# Altium PCB pid lab layout.PcbDoc
Units mil, origin at the board's own origin, x right, y up, seen from the top; angles counter-clockwise.
Board outline 6000 x 4000 mil, 2 copper layers (Top Layer, Bottom Layer); 26 components, 27 nets, 75 pads, 0 vias.
Unrouted connection lines stored in the file: 20.
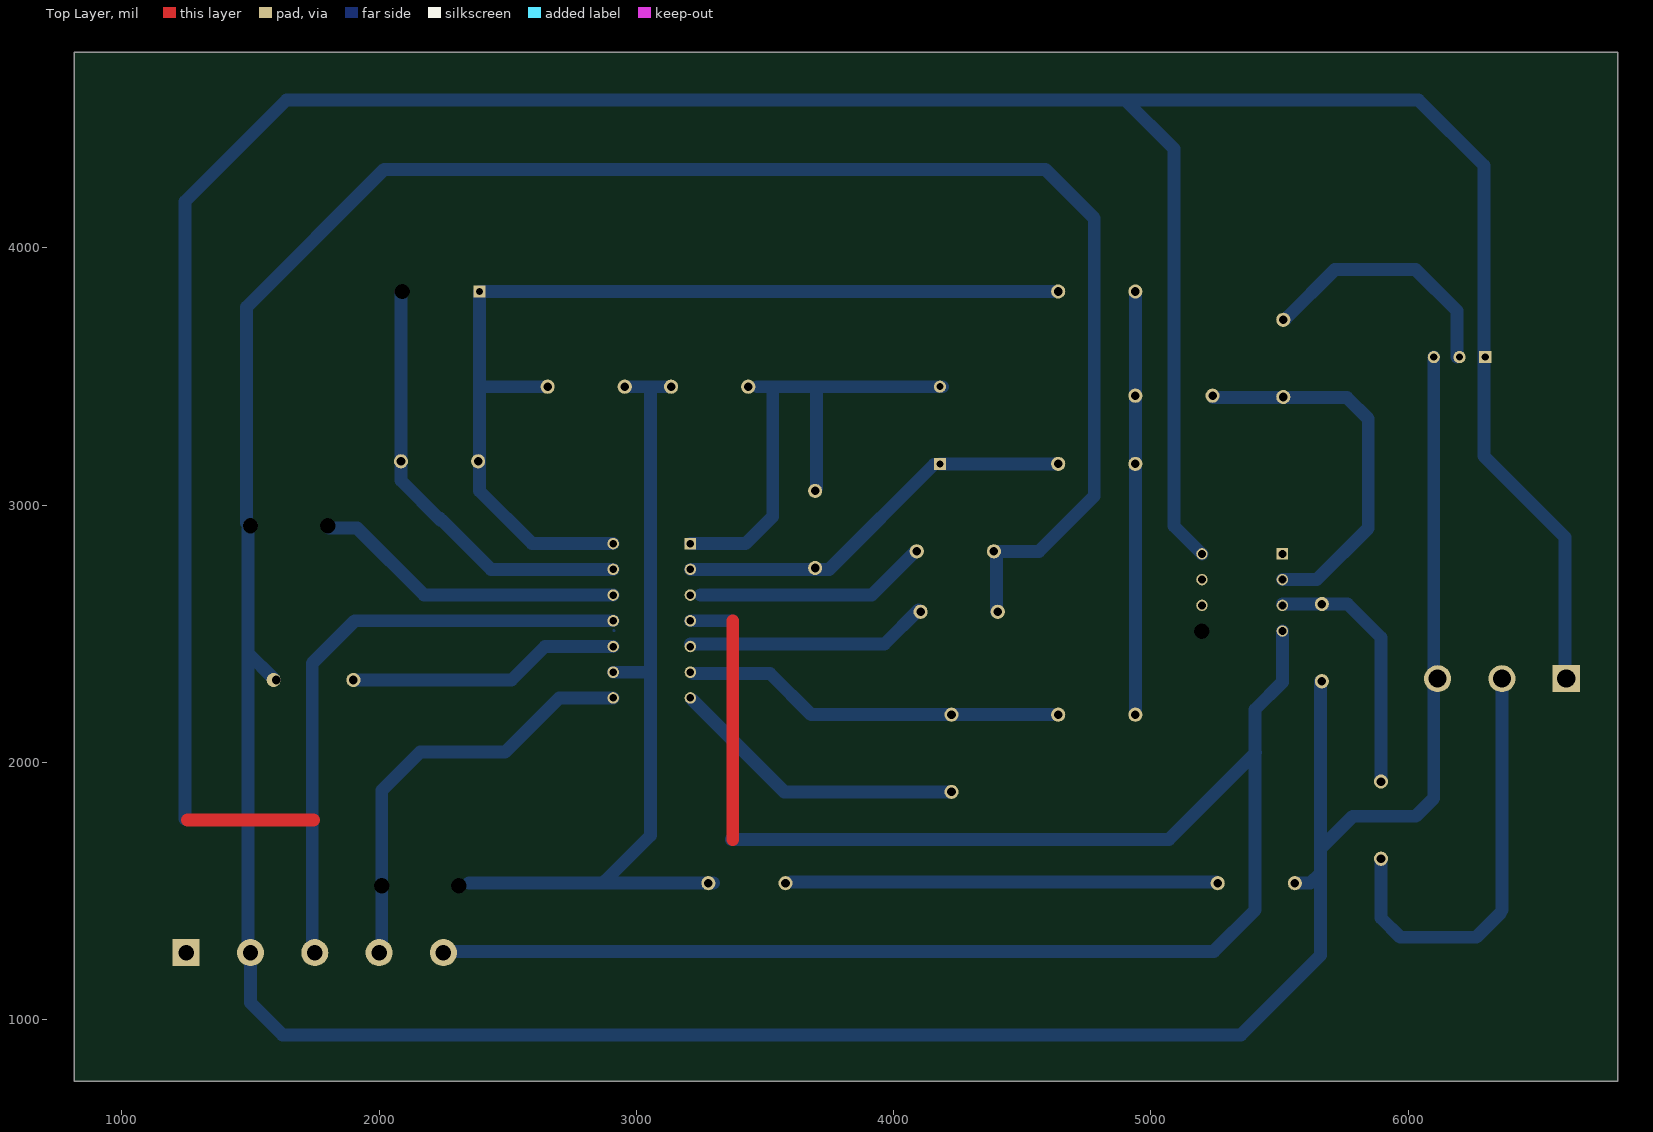
[diagram p0: Top Layer view]
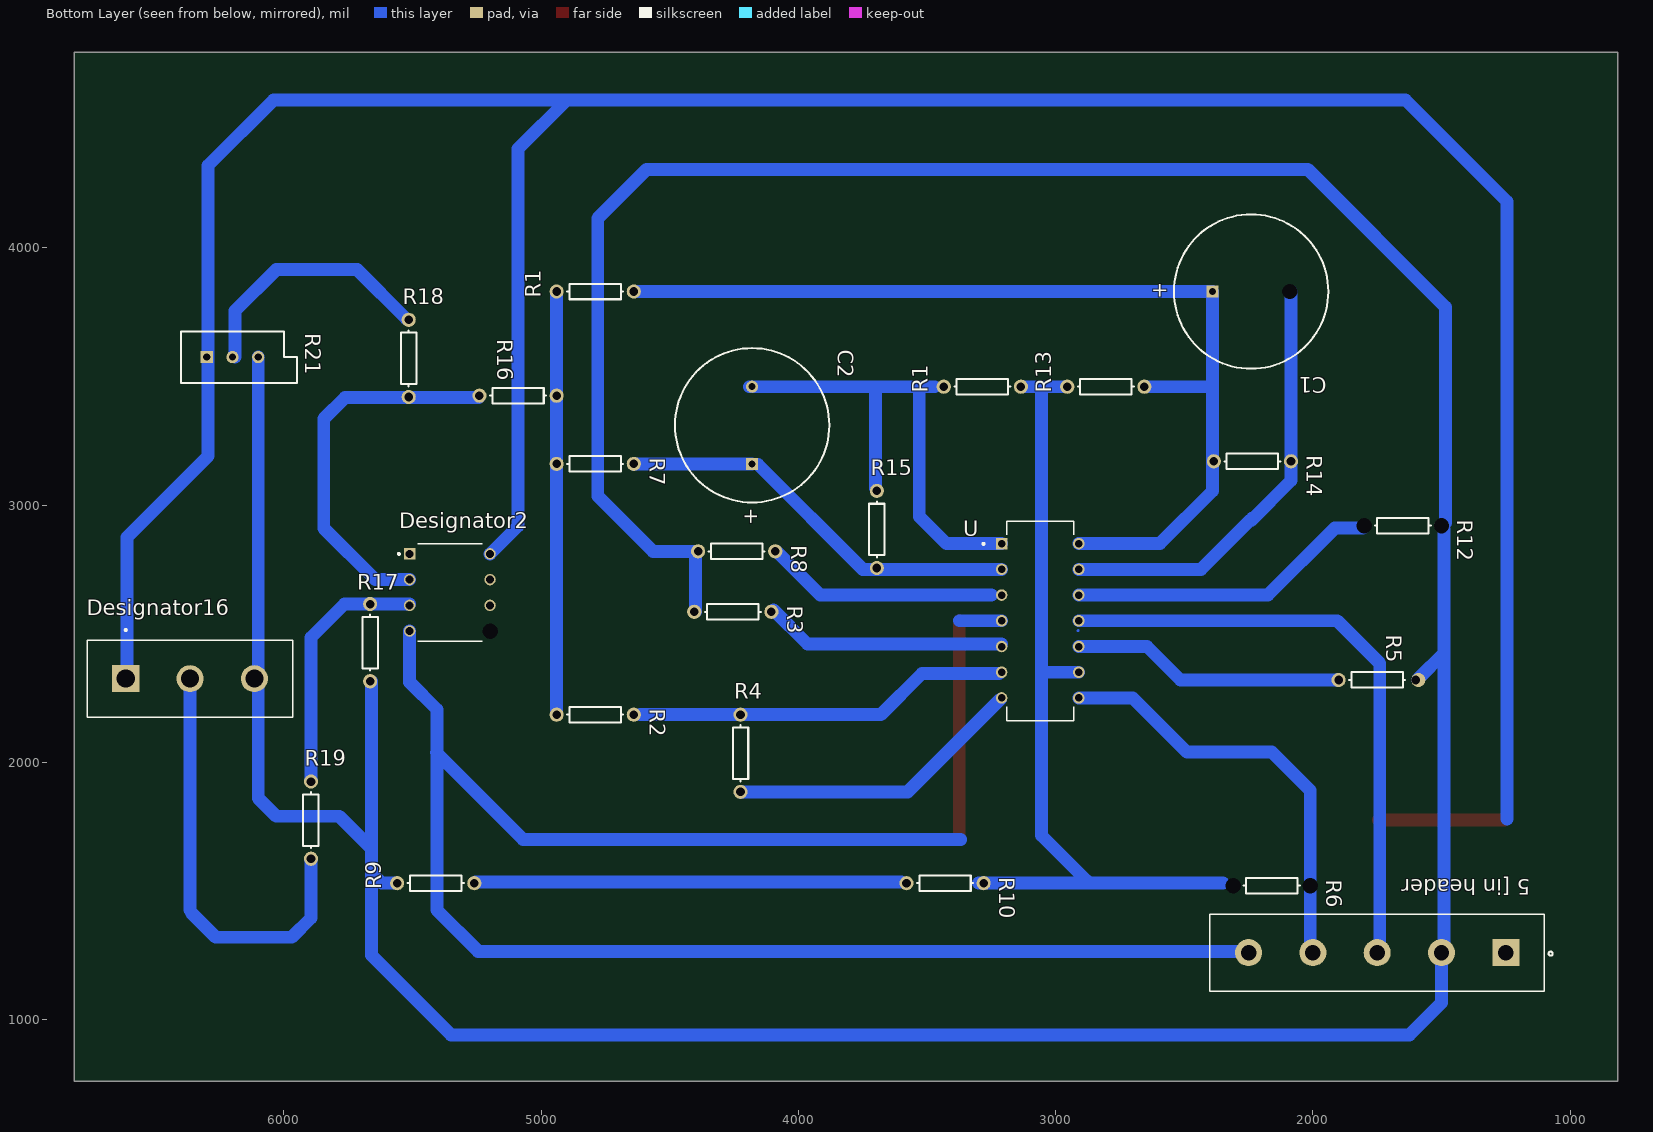
[diagram p1: Bottom Layer view, seen from below]

## Layer stack, top to bottom
Top Solder: solder mask 0.4, Solder Resist, Dk 3.5
Top Layer: signal copper 1.4
Dielectric 1: dielectric 12.6, FR-4, Dk 4.8
Bottom Layer: signal copper 50
Bottom Solder: solder mask 0.4, Solder Resist, Dk 3.5

## Board outline
815,760 6815,760 6815,4760 815,4760

## Design rules (kind name [scope] priority, off if disabled: settings)
Clearance [All] p1: gap=10 ignorepadtopadclearanceinfootprint=FALSE except(0: Arc-Hole Track-Hole SMDPad-Hole THPad-Hole Via-Hole Fill-Hole Poly-Hole Region-Hole Text-Hole)
PolygonConnect [All] p1: connectstyle=Relief reliefconductorwidth=10 reliefentries=4 polygonreliefangle="90 Angle" airgapwidth=10
RoomDefinition pid [InComponentClass('pid')] p1: confinementstyle=ConfineIn formatcopy=TRUE lockcomponents=FALSE outline 7150,1180 7095,1180 7095,1210 7150,1210
RoutingVias [All] p1: holewidth=28 width=50 viastyle="Through Hole" minholewidth=28 minwidth=50 maxholewidth=28 maxwidth=50
SolderMaskExpansion [All] p1: expansion=4
Width [All] p1: maxlimit=10 minlimit=10 preferedwidth=10
30 further rules are at their usual default settings.

## Classes and differential pairs
component class pid: C1 C2 R1 R2 R3 R4 R5 R6 R7 R8 R9 R10 R12 R13 R14 R15 R16 R17 R19 R21 T U

## Components (designator, comment, footprint, x,y, rotation, side; value= is the part's Value field where it differs from the comment)
"5 [in header" "Comment" TE_640466-1 1750,1260 r0 bottom
C1 "" RB7.6-15#1 2240,3830 r0 bottom value=220nF
C2 "" RB7.6-15#2 4180,3310 r270 bottom value=220nF
Designator2 "Comment" DIP794W45P254L959H508Q8 5355,2660 r180 bottom
Designator16 "Comment" TE_350825-4 6365,2325 r180 bottom
R1 "" AXIAL-0.3#1 3285,3460 r0 bottom value=1K
R1 "" AXIAL-0.3#1 4790,3830 r0 bottom value=4.7K
R2 "" AXIAL-0.3#1 4790,2185 r180 bottom value=1K
R3 "" AXIAL-0.3#1 4255,2585 r180 bottom value=1K
R4 "" AXIAL-0.3#1 4225,2035 r90 bottom value=1K
R5 "" AXIAL-0.3#2 1750,2320 r180 bottom value=1K
R6 "" AXIAL-0.3#3 2160,1520 r180 bottom value=1K
R7 "" AXIAL-0.3#1 4790,3160 r180 bottom value=4.7K
R8 "" AXIAL-0.3#1 4240,2820 r180 bottom value=4.7K
R9 "" AXIAL-0.3#1 5410,1530 r0 bottom value=1K
R10 "" AXIAL-0.3#1 3430,1530 r180 bottom value=1K
R12 "" AXIAL-0.3#3 1650,2920 r180 bottom value=4.7K
R13 "" AXIAL-0.3#1 2805,3460 r0 bottom value=1K
R14 "" AXIAL-0.3#1 2235,3170 r180 bottom value=4.7K
R15 "" AXIAL-0.3#1 3695,2905 r90 bottom value=4.7K
R16 "" AXIAL-0.3#1 5090,3425 r180 bottom value=100K
R17 "" AXIAL-0.3#1 5665,2465 r90 bottom value=100K
R18 "" AXIAL-0.3#1 5515,3570 r90 bottom value=100K
R19 "" AXIAL-0.3#1 5895,1775 r90 bottom value=100K
R21 "50%" VR5 6200,3575 r180 bottom value=1K
U "LM324N" DIP762W45P254L1969H508Q14 3060,2550 r180 bottom

## Footprints (in the part's own frame and the unit in brackets; to place one, negate y for a bottom-side part, rotate by r counter-clockwise, add the part's x,y. Pads: shape width x height; smd on the part's side, far side on the other; paste and mask are expansions set on the pad)
AXIAL-0.3#1 [mm] "Axial Device, Thru-Hole; 2 Leads; 0.3 in Pin Spacing"
  round 1.4 hole 0.85: 1(-3.81,0) 2(3.81,0)
  silkscreen extent -2.77,-0.76 2.77,0.76
AXIAL-0.3#2 [mm] "Axial Device, Thru-Hole; 2 Leads; 0.3 in Pin Spacing"
  round 1.4 hole 0.85: 1(-3.81,0)
  round 1.4 hole 0.85 copper offset 0.254,0: 2(3.81,0)
  silkscreen extent -2.77,-0.76 2.77,0.76
AXIAL-0.3#3 [mm] "Axial Device, Thru-Hole; 2 Leads; 0.3 in Pin Spacing"
  round 1.4 hole 1.524: 1(-3.81,0) 2(3.81,0)
  silkscreen extent -2.77,-0.76 2.77,0.76
DIP762W45P254L1969H508Q14 [mm]
  rect 1.14x1.14 hole 0.74: 1(-3.81,7.62)
  round 1.14 hole 0.74: 2(-3.81,5.08) 3(-3.81,2.54) 4(-3.81,0) 5(-3.81,-2.54) 6(-3.81,-5.08) 7(-3.81,-7.62) 8(3.81,-7.62) 9(3.81,-5.08) 10(3.81,-2.54) 11(3.81,0) 12(3.81,2.54) 13(3.81,5.08) 14(3.81,7.62)
  silkscreen extent -5.7,-9.85 3.3,9.85
DIP794W45P254L959H508Q8 [mm]
  rect 1.13x1.13 hole 0.78: 1(-3.97,3.81)
  round 1.13 hole 0.78: 2(-3.97,1.27) 3(-3.97,-1.27) 4(-3.97,-3.81) 6(3.97,-1.27) 7(3.97,1.27) 8(3.97,3.81)
  round 1.13 hole 1.524: 5(3.97,-3.81)
  silkscreen extent -5.13,-4.79 3.18,4.79
RB7.6-15#1 [mm] "Polarized Capacitor (Radial); 2 Leads"
  rect 1.2x1.2 hole 0.7: 1(3.81,0)
  round 1.2 hole 1.524: 2(-3.81,0)
  silkscreen extent -7.62,-7.62 7.62,7.62
RB7.6-15#2 [mm] "Polarized Capacitor (Radial); 2 Leads"
  rect 1.2x1.2 hole 0.7: 1(3.81,0)
  round 1.2 hole 0.7: 2(-3.81,0)
  silkscreen extent -7.62,-7.62 7.62,7.62
TE_350825-4 [mm]
  rect 2.67x2.67 hole 1.78: 1(-6.35,0)
  round 2.67 hole 1.78: 2(0,0) 3(6.35,0)
  silkscreen extent -10.16,-3.81 10.16,4.91
TE_640466-1 [mm]
  rect 2.67x2.67 hole 1.524: 1(-12.7,0)
  round 2.67 hole 1.524: 2(-6.35,0) 3(0,0) 4(6.35,0) 5(12.7,0)
  silkscreen extent -17.33,-3.81 16.51,3.81
VR5 [mm] "Thru-Hole; 3 Leads"
  rect 1.2x1.2 hole 0.7: 1(-2.54,0)
  round 1.2 hole 0.7: 2(0,0) 3(2.54,0)
  silkscreen extent -5.08,-2.54 6.35,2.54

## Part data
C1 C2: library part "Cap Pol1", "Polarized Capacitor (Radial)", LatestRevisionDate=17-Jul-2002, LatestRevisionNote="Re-released for DXP Platform.", PackageDescription="Polarized Capacitor (Radial); 2 Leads", PackageReference=RB7.6-15, Published=8-Jun-2000, Publisher="Altium Limited"
R1 R1 R2 R3 R4 R5 R6 R7 R8 R9 R10 R12 R13 R14 R15 R16 R17 R18 R19: library part Res1, "Resistor", LatestRevisionDate=17-Jul-2002, LatestRevisionNote="Re-released for DXP Platform.", PackageDescription="Axial Device, Thru-Hole; 2 Leads; 0.3 in Pin Spacing", PackageReference=AXIAL-0.3, Published=8-Jun-2000, Publisher="Altium Limited"
R21: library part RPot, "Potentiometer", LatestRevisionDate=17-Jul-2002, LatestRevisionNote="Re-released for DXP Platform.", PackageDescription="Variable Resistor, Thru-Hole; 3 Leads", PackageReference=VR5, Published=8-Jun-2000, Publisher="Altium Limited", Set Position=0.5, Sim Note="Enter the Resistance value and the set point into parameter fields."
U: "General Purpose Amplifier 4 Circuit 14-DIP", Package="DIP-14 STMicroelectronics", Availability=Unavailable, MF="Texas Instruments", MP=LM324N, Price=None, SnapEDA_Link=https://www.snapeda.com/parts/LM324N/Texas%20Instruments/view-part/295/?ref=snap

## Nets (pads, with @x,y where several pads share a name; then routed paths per layer and width w, separated by ;. In a path a pad name is that pad's centre, name@x,y a point inside that pad or via, vN(x,y) a via of type N, cw(c..) or ccw(c..) an arc to the next point about the centre after c; other vN are vias at no path point)
+5: R21.1 | length 1256.2
  Bottom Layer w10: 6085,2325 6100,2340
  Bottom Layer w50: 6100,2340 6100,3575
GND: R3.1 R5.2 R8.1 R9.1 R12.2 R17.1 R21.2 | length 10677.4
  Bottom Layer w10: R8.1 R8.1@4400,2820 ; 5660,1675 5670,1675 ; 6090,2180 6090,2290
  Bottom Layer w50: R12.2@1485,2930 1485,3770 2020,4305 4590,4305 4780,4115 4780,3035 4565,2820 4400,2820 R3.1@4400,2585 ; 1490,1250 1490,2425 ; R12.2@1490,2905 1490,2425 ; R5.2@1590,2325 1490,2425 ; 5660,1675 R17.1@5660,2315 ; 5670,1675 5785,1790 6030,1790 6100,1860 6100,2330 ; 6365,1425 6365,2340
NetC1_1: C1.1 R1.2@4940,3830 | length 2920
  Bottom Layer w50: C1.1 4640,3830 ; 4940,3160 R1.2@4940,3830
NetC1_2: C1.2 R14.2 U.13 | length 1717
  Bottom Layer w50: C1.2@2085,3830 2085,3095 2240,2940 2245,2940 ; 2235,2950 2245,2940 ; U.13 2435,2750 2245,2940
NetC2_1: C2.1 R7.2 R15.1 U.2 | length 1576.3
  Bottom Layer w50: U.2 3750,2750 C2.1@4157.5,3157.5 ; C2.1 R7.2
NetC2_2: C2.2 R1.1@3135,3460 R15.2 U.1 | length 1248.5
  Bottom Layer w50: U.1 3425,2850 3530,2955 3530,3460 ; R15.2@3700,3065 3700,3445
NetJ_1: 
NetJ_2: 
NetR1_1: R1.1@4640,3830 R2.1 R7.1 R16.2 | length 955
  Bottom Layer w50: R2.1@4940,2205 R7.1
NetR1_2: R1.2@3435,3460 R6.1 R10.2 R13.1 U.9 | length 4052.5
  Bottom Layer w50: 2350,1530 R10.2 R10.2@3300,1530 ; 2395,3460 R13.1 ; 2880,1540 3055,1715 3055,2350 ; U.9 3055,2350 ; 3055,3445 3055,2350 ; 3470,3460 4190,3460
NetR2_2: R2.2 R4.2 U.6 | length 1461.3
  Bottom Layer w50: U.6@3220,2345 3520,2345 3680,2185 R4.2 R2.2@4615,2185
NetR3_2: R3.2 U.5 | length 942.4
  Bottom Layer w50: U.5@3210,2460 3965,2460 R3.2@4097.5,2592.5
NetR4_1: R4.1 R9.2 R10.1 U.7 | length 7890.9
  Bottom Layer w50: 1500,1260 1500,1065 1625,940 5350,940 5660,1250 5660,1570 ; U.7@3214.92,2245 3574.92,1885 R4.1 ; R10.1@3600,1535 5255,1535 ; R9.2 5620,1530 5660,1570 ; 5660,1675 5660,1570
NetR5_1: R5.1 U.10 | length 1063.8
  Bottom Layer w50: R5.1 2515,2320 2645,2450 U.10
NetR6_2: R6.2 U.8 | length 1689.1
  Bottom Layer w50: 2010,1250 R6.2 2010,1890 2160,2040 2490,2040 2700,2250 U.8
NetR8_2: R8.2 U.3 | length 910.5
  Bottom Layer w50: 3249.92,2650 3915,2650 4085,2820 R8.2
NetR12_1: R12.1 U.12 | length 1212.7
  Bottom Layer w50: R12.1@1805,2910 1915,2910 2175,2650 U.12
NetR13_2: R13.2 R14.1 U.14 | length 1544.9
  Bottom Layer w50: 2390,3830 2390,3055 2595,2850 U.14 ; R13.2@2970,3460 3135,3460
NetR16_1: R16.1 R18.2 | length 1462.5
  Bottom Layer w50: R16.1@5242.5,3417.5 5715,3417.5 ; R18.2@5525,3725 5715,3915 6030,3915 6190,3755 6190,3575
NetR17_2: R17.2 R19.2 | length 838.8
  Bottom Layer w50: R17.2@5670,2615 5765,2615 5895,2485 R19.2
NetR18_1: R18.1 R21.3
NetR19_1: R19.1 | length 765.4
  Bottom Layer w50: R19.1 5895,1395 5970,1320 6265,1320 6360,1415
NetR23_1: U.4 | length 180.5
  Bottom Layer w10: 2912,2513 2913,2512 ; 3700,2462.44 3700,2476.57
  Bottom Layer w50: U.4 3375,2550
NetR23_2: 
NetR25_2: 
NetT_3: 
NetU_2: U.11 | length 2338.3
  Bottom Layer w50: 1740,1285 1740,2385 1905,2550 U.11
pads on no net: "5 [in header.1" "5 [in header.2" "5 [in header.3" "5 [in header.4" "5 [in header.5" Designator2.1 Designator2.2 Designator2.3 Designator2.4 Designator2.5 Designator2.6 Designator2.7 Designator2.8 Designator16.1 Designator16.2 Designator16.3
copper on no net: | length 20746.8
  Top Layer w50: 1255,1775 1745,1775 ; 3375,1700 3375,2550
  Bottom Layer w50: 1245,1780 1245,4180 1640,4575 6040,4575 6295,4320 6295,4055 6295,3190 6610,2875 6610,2330 ; 2265,1265 5245,1265 5405,1425 5405,2205 5511.3,2311.3 5511.3,2510 ; 3368.7,1700 5070,1700 5407.5,2037.5 ; 4900,4575 5090,4385 5090,2918.7 5198.7,2810 ; 5511.3,2615 5670,2615 ; 5511.3,2710 5645,2710 5845,2910 5845,3335 5762.5,3417.5 5715,3417.5

## Text inside footprints (layer, text, board x,y; h text height)
C1: Bottom Overlay "+" at 2560.15,3859.01 h59.06 r180
C2: Bottom Overlay "+" at 4209.01,2989.85 h59.06 r90